# Altium PCB PCB1.PcbDoc (part 2 of 3)
Units mil, origin at the board's own origin, x right, y up, seen from the top; angles counter-clockwise.
Board outline 1649.96 x 1854.5 mil, 6 copper layers (Top Layer, Layer 2, Layer 3, Layer 4, Layer 5, Bottom Layer), stack 32.112 mil thick; 86 components, 196 nets, 681 pads, 452 vias.
Unrouted connection lines stored in the file: 66.
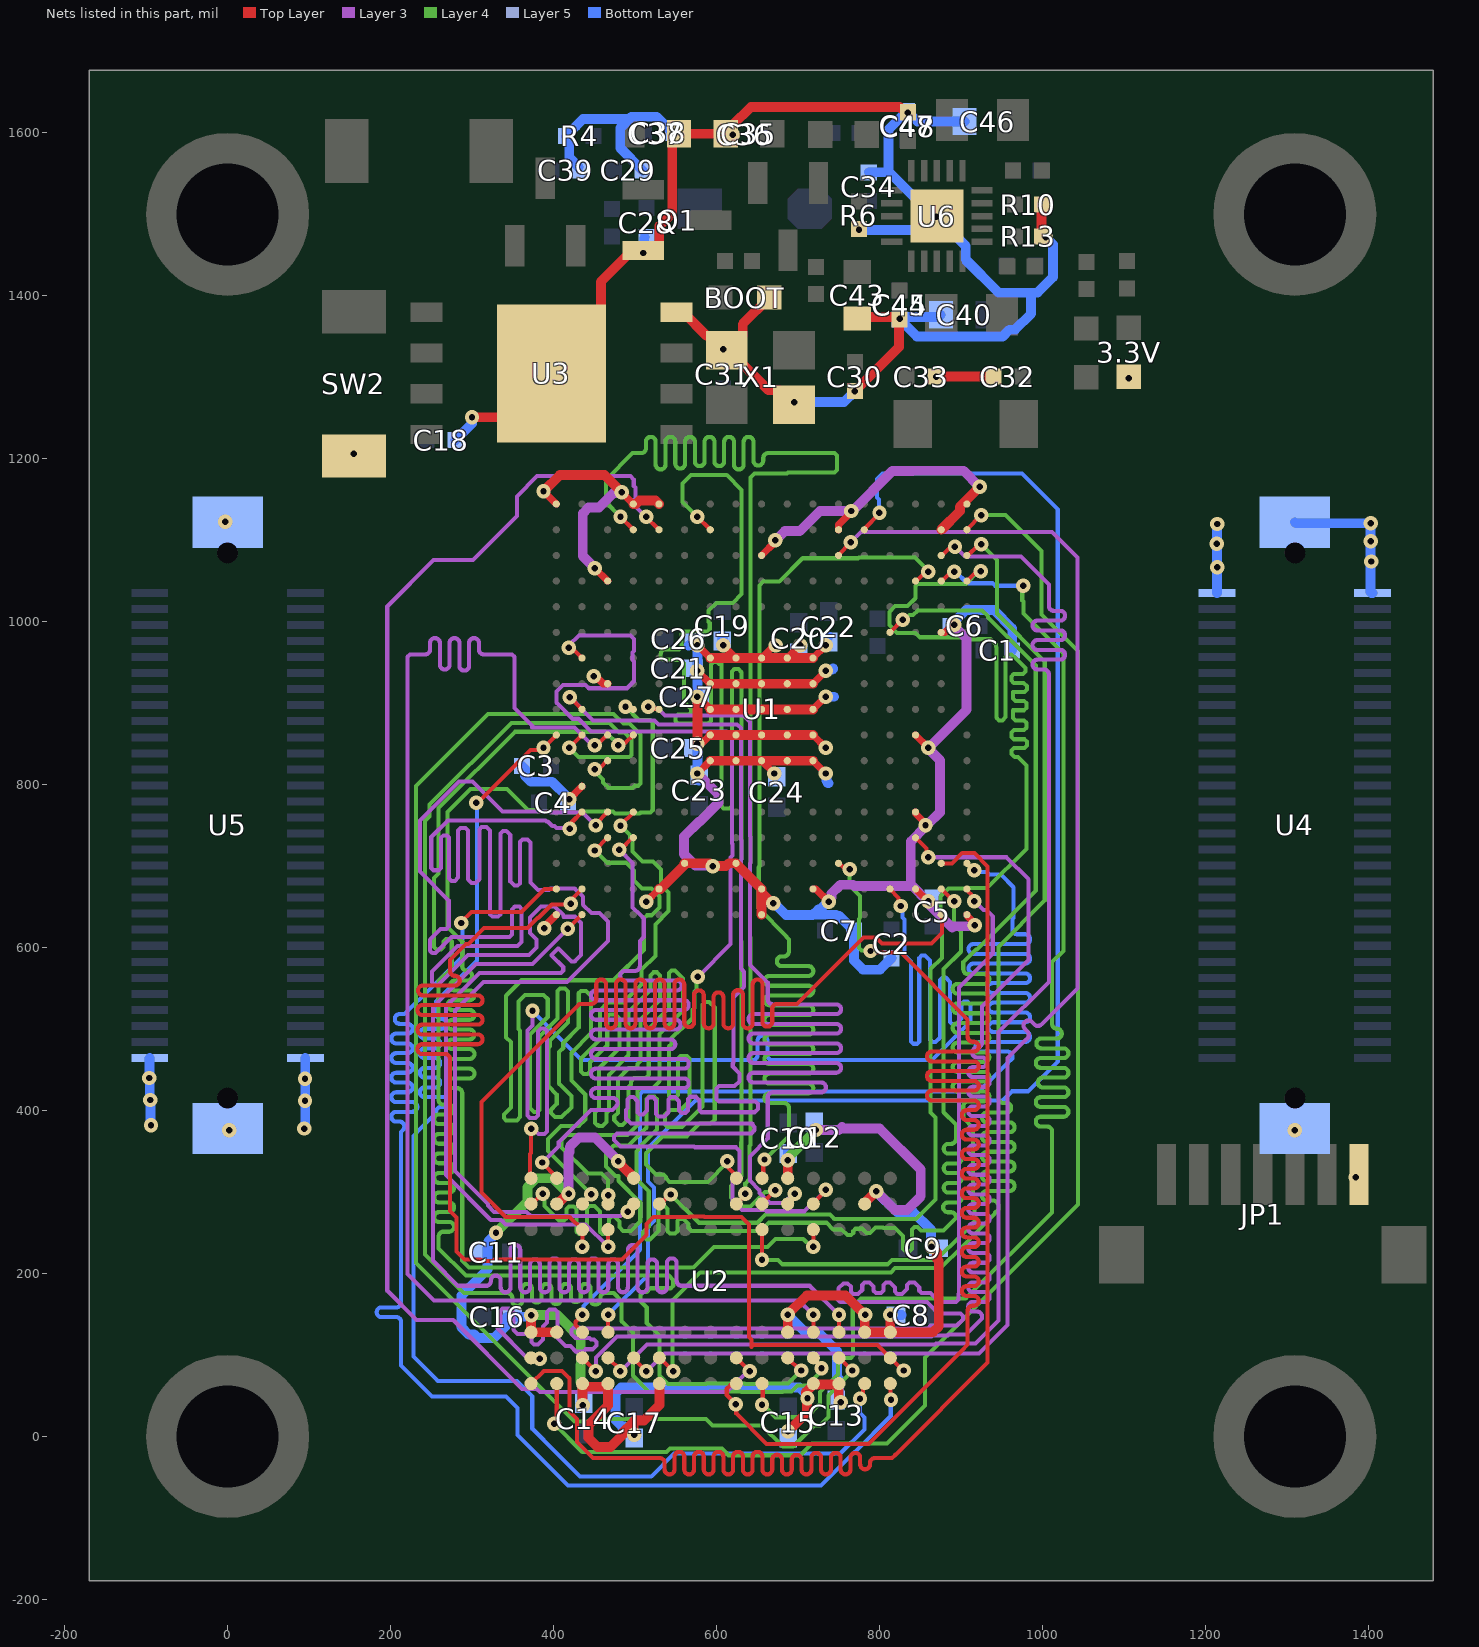
[diagram p6: the nets of this part, all layers, seen from the top]

## Via types
v1: diameter 17.7, hole 7.9, Top Layer to Bottom Layer, tented both sides, 452 vias

## Nets (pads, with @x,y where several pads share a name; then routed paths per layer and width w, separated by ;. In a path a pad name is that pad's centre, name@x,y a point inside that pad or via, vN(x,y) a via of type N, cw(c..) or ccw(c..) an arc to the next point about the centre after c; other vN are vias at no path point) (continued)
"FMC_D5 / PE8": U1.T9 U2.M8 | length 1828.9
  Top Layer w5: v1(420.01,907.5) U1.T9@435.01,892.5 ; U2.M8@718.98,285.49 718.98,287.98 720.62,287.98 734.4,301.77 v1(734.4,302.62)
  Layer 3 w5: v1(420.01,907.5) 448.5,879 524,879 529,874 625.54,874 629.98,869.55 629.98,732.62 630.98,731.62 630.98,708.84 629.98,707.84 629.98,574.46 634,570.44 634,552 620.93,538.93 620.93,458.93 620.07,458.07 620.07,453.93 628.39,445.61 628.39,435.93 622.46,430 602.93,430 600,427.07 600,413.93 602.93,411 648.07,411 651,408.07 651,402 647,398 581.93,398 579,400.93 579,413 576.98,415.02 575,417 567.93,417 565,414.07 565,399.93 562.07,397 556.93,397 554,399.93 554,411.5 549,416.5 543.93,416.5 541,413.57 541,398 536,393 529,393 526,396 526,412.5 522.07,416.43 517.93,416.43 515,413.5 515,399.93 510.07,395 505.93,395 503,397.93 503,411.5 498,416.5 493.93,416.5 491,413.57 491,403 489,401 489,390 494.93,384.07 644,384.07 644,383 646.93,380.07 646.93,375.93 643,372 478,372 474.28,368.28 474.28,364.14 482.21,356.21 572.44,356.21 573.64,355 624,355 628.46,350.54 628.46,324 620,315.54 620,289.26 631.26,278 659.94,278 661.44,276.5 708.28,276.5 v1(734.4,302.62)
"FMC_D6 / PE9": U1.P9 U2.M7 | length 1787.9
  Top Layer w5: v1(488.41,895.81) 491.39,895.81 493.97,893.23 497.26,893.23 U1.P9@498,892.5 ; v1(719,232.98) U2.M7@718.98,253.99
  Layer 4 w5: v1(488.41,895.81) 505.09,879.13 518.9,879.13 521.83,876.2 521.83,768.69 518.9,765.76 506.91,765.76 505.91,764.76 475.59,764.76 473.08,767.26 435.91,767.26 434.41,765.76 399.17,765.76 397.66,767.26 380.93,767.26 379.19,769 369,769 343,795 298.36,795 270,766.64 270,625.38 288,607.38 288,589 288,577.5 ccw(c294,577.5) 294,571.5 cw(c294,565.5) 294,559.5 279.08,559.5 ccw(c279.08,553.5) 279.08,547.5 297,547.5 cw(c297,541.5) 297,535.5 276,535.5 ccw(c276,529.5) 276,523.5 297,523.5 cw(c297,517.5) 297,511.5 276,511.5 ccw(c276,505.5) 276,499.5 297,499.5 cw(c297,493.5) 297,487.5 276,487.5 ccw(c276,481.5) 276,475.5 297,475.5 cw(c297,469.5) 297,463.5 276,463.5 ccw(c276,457.5) 276,451.5 297,451.5 cw(c297,445.5) 297,439.5 276,439.5 ccw(c276,433.5) 276,427.5 282,427.5 cw(c282,421.5) 288,421.5 288,419 288,400.8 288,216 296.58,207.42 572.07,207.42 597,232.35 662.63,232.35 672.67,242.39 706.6,242.39 716.02,232.98 v1(719,232.98)
"FMC_D7 / PE10": U1.N9 U2.L8 | length 1818.2
  Top Layer w5: v1(516.18,895.63) 519.16,895.63 521.56,893.23 528.76,893.23 U1.N9@529.5,892.5 ; U2.L8@687.49,285.49 687.49,287.23 696.4,296.15 v1(696.4,297.89)
  Layer 3 w5: v1(516.18,895.63) 518.29,893.53 528.46,893.53 536.99,885 633,885 640.98,877.02 640.98,737.17 641.98,736.17 641.98,704.28 640.98,703.28 640.98,579.02 663,557 663,539 663,536.5 ccw(c669,536.5) 669,530.5 747,530.5 cw(c747,524.5) 747,518.5 645.46,518.5 ccw(c645.46,512.5) 645.46,506.5 747,506.5 cw(c747,500.5) 747,494.5 645.46,494.5 ccw(c645.46,488.5) 645.46,482.5 747,482.5 cw(c747,476.5) 747,470.5 645.46,470.5 ccw(c645.46,464.5) 645.46,458.5 747,458.5 cw(c747,452.5) 747,446.5 645.46,446.5 ccw(c645.46,440.5) 645.46,434.5 728.42,434.5 cw(c728.42,428.5) 728.42,422.5 669,422.5 ccw(c669,416.5) 663,416.5 663,400.8 663,365.92 640.98,343.9 640.98,314.29 653.04,302.23 653.04,299.04 665.58,286.5 682.34,286.5 693.73,297.89 v1(696.4,297.89)
"FMC_D8 / PE11": U1.P10 U2.L2 | length 1810
  Top Layer w5: v1(479.48,848.66) 481.91,851.09 488.09,851.09 U1.P10@498,861 ; U2.L2@687.49,96.51 703,81 v1(704,81)
  Layer 4 w5: v1(479.48,848.66) 479.48,849.67 464.15,865 352.81,865 259,771.19 259,690.85 253.5,685.34 253.5,600.93 256.42,598 262.07,598 265,600.93 265,607.66 267.93,610.58 272.07,610.58 275.18,607.47 275.18,575.18 259,559 259,449.37 259,413.36 ccw(c265,413.36) 265,407.36 271,407.36 cw(c271,401.36) 271,395.36 259.5,395.36 ccw(c259.5,389.36) 259.5,383.36 272,383.36 cw(c272,377.36) 272,371.36 259.5,371.36 ccw(c259.5,365.36) 259.5,359.36 272,359.36 cw(c272,353.36) 272,347.36 259.5,347.36 ccw(c259.5,341.36) 259.5,335.36 272,335.36 cw(c272,329.36) 272,323.36 259.5,323.36 ccw(c259.5,317.36) 259.5,311.36 272,311.36 cw(c272,305.36) 272,299.36 259.5,299.36 ccw(c259.5,293.36) 259.5,287.36 272,287.36 cw(c272,281.36) 272,275.36 259.5,275.36 ccw(c259.5,269.36) 259.5,263.36 272,263.36 cw(c272,257.36) 272,251.36 265,251.36 ccw(c265,245.36) 259,245.36 259,230.86 292.44,197.42 541.58,197.42 547,192 547,185 544,182 519,182 514.5,177.5 510.5,177.5 507,174 507,166 514.5,158.5 514.5,139.5 530,124 530,75.08 540.43,64.65 587.32,64.65 587.67,65 634.56,65 635.06,64.5 659.79,64.5 660.29,65 688,65 v1(704,81)
"FMC_D9 / PE12": U1.R10 U2.M3 | length 1799.9
  Top Layer w5: v1(450.76,848.66) 453.12,848.66 465.46,861 U1.R10@466.5,861 ; U2.M3@718.98,128.01 718.98,142.11 v1(718.99,149.5)
  Layer 3 w5: v1(450.76,848.66) 447.35,848.66 426.01,870 374,870 374,872 352,894 352,957.07 349.07,960 331.02,960 314.5,960 cw(c314.5,966) 308.5,966 308.5,974 ccw(c302.5,974) 296.5,974 296.5,946 cw(c290.5,946) 284.5,946 284.5,974 ccw(c278.5,974) 272.5,974 272.5,947.5 cw(c266.5,947.5) 260.5,947.5 260.5,974 ccw(c254.5,974) 248.5,974 248.5,966 cw(c242.5,966) 242.5,960 240,960 223.93,960 221,957.07 221,199.56 253.56,167 284.77,167 701.07,167 718.57,149.5 v1(718.99,149.5)
"FMC_D10 / PE13": U1.T10 U2.M2 | length 1782.8
  Top Layer w5: v1(419.26,845.25) U1.T10@435.01,861 ; U2.M2@718.98,96.51 718.98,95.04 729,85.03 v1(729,83.55)
  Layer 4 w5: v1(419.26,845.25) 419.5,845.25 430.94,833.81 493.05,833.81 495.98,836.74 495.98,855.11 486.92,864.17 480.54,864.17 468.71,876 348.25,876 248,775.75 248,761.08 242.5,755.58 242.5,223.5 284.77,181.23 290,176 303,176 343.5,176 cw(c343.5,170) 349.5,170 349.5,166.3 ccw(c355.5,166.3) 361.5,166.3 361.5,181.42 cw(c367.5,181.42) 373.5,181.42 373.5,170.58 ccw(c379.5,170.58) 385.5,170.58 385.5,181.42 cw(c391.5,181.42) 397.5,181.42 397.5,168.58 ccw(c403.5,168.58) 409.5,168.58 409.5,181.42 cw(c415.5,181.42) 421.5,181.42 421.5,171 ccw(c427.5,171) 433.5,171 433.5,181.42 cw(c439.5,181.42) 445.5,181.42 445.5,167.9 ccw(c451.5,167.9) 457.5,167.9 457.5,170 cw(c463.5,170) 463.5,176 466,176 474,176 483.5,166.5 483.5,141.5 497.5,127.5 497.5,74.58 517.43,54.65 591.46,54.65 591.81,55 630.42,55 630.92,54.5 681.08,54.5 681.58,55 692.14,55 699.64,62.5 714.99,62.5 719.79,67.3 719.79,71.37 729,80.58 v1(729,83.55)
"FMC_D11 / PE14": U1.U10 U2.P1 | length 1765.5
  Top Layer w5: v1(305.15,777.85) 306.85,777.85 371.82,842.82 385.33,842.82 U1.U10@403.51,861 ; v1(776.27,46.47) 776.27,49.44 779.84,53.01 779.84,62.88 U2.P1@781.98,65.02
  Bottom Layer w5: v1(305.15,777.85) 306,777 306,584 256,534 256,528 256,518.5 ccw(c262,518.5) 262,512.5 262.8,512.5 cw(c262.8,506.5) 262.8,500.5 242,500.5 ccw(c242,494.5) 242,488.5 255,488.5 cw(c255,482.5) 255,476.5 242,476.5 ccw(c242,470.5) 242,464.5 255,464.5 cw(c255,458.5) 255,452.5 242,452.5 ccw(c242,446.5) 242,440.5 255,440.5 cw(c255,434.5) 255,428.5 242,428.5 ccw(c242,422.5) 242,416.5 266.77,416.5 cw(c266.77,410.5) 266.77,404.5 262,404.5 ccw(c262,398.5) 256,398.5 256,397 237,378 228,369 228,98 258,68 355,68 374,49 374,9.52 402.32,-18.8 432.52,-49 520.06,-49 548.08,-20.98 752.02,-20.98 781.73,8.73 781.73,23.38 776.27,28.84 v1(776.27,46.47)
  other v1: 387.76,845.25
"FMC_D12 / PE15": U1.R11 U2.N2 | length 1768.9
  Top Layer w5: v1(450.53,818.96) 452.96,821.39 457.75,821.39 465.86,829.5 U1.R11@466.5,829.5 ; U2.N2@750.48,96.51 751.11,96.51 766.49,81.13 v1@766.87,81.13
  Layer 4 w5: v1(450.53,818.96) 450.53,816.89 461.06,806.36 461.06,802.83 467.88,796 497.12,796 499.88,798.76 504.05,798.76 506.98,801.69 506.98,861.69 493.5,875.17 485.72,875.17 473.89,887 319.81,887 231.5,798.69 231.5,212.77 284.77,159.49 425.77,18.5 452.58,18.5 455.58,21.5 587.32,21.5 595.32,13.5 655.53,13.5 681.48,-12.46 694.32,-12.46 720.28,13.5 727.05,13.5 737.33,23.78 737.33,50.56 767,80.23 v1@767,80.64
  other v1: 767,81
"FMC_D13 / PD8": U1.U16 U2.R1 | length 1752
  Top Layer w5: v1(286.79,630.3) 286.79,631.38 299.41,644 329.54,644 361,644 389.08,672.08 403.45,672.08 U1.U16@403.51,672.02 ; U2.R1@813.47,65.02 813.87,64.61 813.87,45.4 v1(814.27,45)
  Bottom Layer w5: v1(286.79,630.3) 288.16,628.93 288.16,589.16 248.37,549.37 219.26,520.26 cw(c215.02,524.5) 215.02,518.5 211.23,518.5 ccw(c211.23,512.5) 211.23,506.5 221,506.5 cw(c221,500.5) 221,494.5 207,494.5 ccw(c207,488.5) 207,482.5 221,482.5 cw(c221,476.5) 221,470.5 207,470.5 ccw(c207,464.5) 207,458.5 221,458.5 cw(c221,452.5) 221,446.5 207,446.5 ccw(c207,440.5) 207,434.5 221,434.5 cw(c221,428.5) 221,422.5 207,422.5 ccw(c207,416.5) 207,410.5 226.79,410.5 cw(c226.79,404.5) 226.79,398.5 207,398.5 ccw(c207,392.5) 207,386.5 211.02,386.5 cw(c211.02,380.5) 215.26,376.26 213,374 213,372 213,183 213,164.5 cw(c207,164.5) 207,158.5 189,158.5 ccw(c189,152.5) 189,146.5 207,146.5 cw(c207,140.5) 213,140.5 213,138 213,87 251,49 342,49 356,35 356,2 418,-60 728.56,-60 769.75,-18.8 770.2,-18.8 814,25 814,44.73 v1(814.27,45)
"FMC_D14 / PD9": U1.T17 U2.N3 | length 1816.6
  Top Layer w5: v1(417.3,623.11) 417.45,623.11 434.87,640.53 U1.T17@435.01,640.53 ; U2.N3@750.48,128.01 v1(750.48,149.5)
  Layer 3 w5: v1(417.3,623.11) 417.3,622.82 374.48,580 304.82,580 252,527.18 252,216 283,185 297,185 317.25,185 ccw(c317.25,191) 323.25,191 323.25,191.47 cw(c329.25,191.47) 335.25,191.47 335.25,183 ccw(c341.25,183) 347.25,183 347.25,229 cw(c353.25,229) 359.25,229 359.25,183 ccw(c365.25,183) 371.25,183 371.25,211.42 cw(c377.25,211.42) 383.25,211.42 383.25,183 ccw(c389.25,183) 395.25,183 395.25,212.75 cw(c401.25,212.75) 407.25,212.75 407.25,183 ccw(c413.25,183) 419.25,183 419.25,211.42 cw(c425.25,211.42) 431.25,211.42 431.25,183 ccw(c437.25,183) 443.25,183 443.25,212.73 cw(c449.25,212.73) 455.25,212.73 455.25,183 ccw(c461.25,183) 467.25,183 467.25,211.42 cw(c473.25,211.42) 479.25,211.42 479.25,183 ccw(c485.25,183) 491.25,183 491.25,229 cw(c497.25,229) 503.25,229 503.25,183 ccw(c509.25,183) 515.25,183 515.25,211.42 cw(c521.25,211.42) 527.25,211.42 527.25,183 ccw(c533.25,183) 539.25,183 539.25,212.75 cw(c545.25,212.75) 551.25,212.75 551.25,191 ccw(c557.25,191) 557.25,185 571.75,185 714.56,185 750.06,149.5 v1(750.48,149.5)
"FMC_D15 / PD10": U1.T16 U2.R2 | length 1849.6
  Top Layer w5: v1(421.18,653.94) 419.69,655.44 v1@418.42,655.44 ; U1.T16@435.01,672.02 v1@418.42,655.44 ; v1(830,81) 828.98,81 U2.R2@813.47,96.51 797.9,112.08 645.08,112.08 643,110 643,112.08 643,118.98 640.07,121.91 640.07,260.44 630.95,269.56 585.44,269.56 585,270 568.04,270 567.6,269.56 522.56,269.56 514.08,261.08 514.08,247.54 483.96,217.42 327.53,217.42 325.55,215.44 312.71,215.44 310.73,217.42 290.58,217.42 281,227 281,269 273,277 273,461 273,463.5 ccw(c267,463.5) 267,469.5 239,469.5 cw(c239,475.5) 239,481.5 307,481.5 ccw(c307,487.5) 307,493.5 239,493.5 cw(c239,499.5) 239,505.5 307,505.5 ccw(c307,511.5) 307,517.5 239,517.5 cw(c239,523.5) 239,529.5 307,529.5 ccw(c307,535.5) 307,541.5 239.75,541.5 cw(c239.75,547.5) 239.75,553.5 279,553.5 ccw(c279,559.5) 279,565.5 cw(c279,571.5) 273,571.5 273,585 292.5,604.5 295.43,604.5 314.93,624 329.54,624 368.07,624 380.57,636.5 381.31,636.5 397.91,653.09 416.08,653.09 v1@418.42,655.44
"FMC_D16 / PH8": U1.T13 U2.E8 | length 1840.7
  Top Layer w5: v1(420,746.15) 422.43,748.58 422.43,753.93 U1.T13@435.01,766.51 ; v1(491,276.02) 491,277 498.51,284.51 U2.E8@498.51,285.49
  Layer 3 w5: v1(420,746.15) 419.39,746.76 403.65,746.76 401.15,749.26 398.5,749.26 393,754.76 391.55,754.76 390.04,756.26 270.26,756.26 250,736 250,697.93 252.93,695 259.07,695 262,697.93 262,735 264.93,737.93 269.07,737.93 272,735 272,684.93 274.93,682 279.07,682 283,685.93 283,744.07 285.93,747 292,747 295,744 295,683.94 299.47,679.47 304.53,679.47 309,683.94 309,745.07 311.93,748 318,748 322,744 322,640.93 324.93,638 332.07,638 335,640.93 335,740.19 337.93,743.12 342.07,743.12 347,738.19 347,681 351.93,676.07 356.07,676.07 359,679 359,730 361.93,732.93 368.16,732.93 372,729.09 372,680.2 381.2,671 394.33,671 396.1,672.78 426.09,672.78 436.33,662.54 436.33,652.67 446.57,642.43 456.44,642.43 466.8,632.07 466.8,608.25 416.56,558 313.93,558 279,523.07 279,326 319.5,285.5 319.5,283.36 327.18,275.68 367.04,275.68 372.3,270.41 482.41,270.41 488.02,276.02 v1(491,276.02)
"FMC_D17 / PH9": U1.R13 U2.D7 | length 1809.8
  Top Layer w5: v1(452,750) 452,752.01 U1.R13@466.5,766.51 ; v1(467.02,232.92) U2.D7@467.02,253.99
  Layer 3 w5: v1@450.76,750.76 435.76,765.76 396.1,765.76 394.6,767.26 337.44,767.26 300.71,804 284,804 236,756 236,693.34 271.44,657.9 271.44,625.93 268.51,623 261.5,623 248.25,609.75 248.25,596.25 251.18,593.32 255.32,593.32 275,613 346.07,613 349,615.93 349,647 352.5,650.5 358.07,650.5 361,647.57 361,607 356,602 282,602 251,571 251,557 253.93,554.07 258.07,554.07 295,591 369.92,591 379.21,600.28 379.21,610 371.26,617.95 371.26,637.26 384.5,650.5 401.5,650.5 412.17,639.83 412.17,637.96 426.41,637.96 433.8,630.56 433.8,590.8 426.1,583.1 421.96,583.1 406.21,598.86 405.36,598.86 397.72,591.22 397.72,590.37 412.02,576.07 412.02,571.93 409.09,569 405.56,569 309.37,569 268,527.63 268,320.72 323.04,265.68 335.92,265.68 341.19,260.41 439.52,260.41 v1(467.02,232.92)
"FMC_D18 / PH10": U1.P13 U2.D8 | length 1779.1
  Top Layer w5: U2.D8@467.02,285.49 467.02,295.55 v1(467.36,295.89) ; v1(482.25,749.9) 482.25,750.33 498,766.08 U1.P13@498,766.51
  Layer 4 w5: v1(467.36,295.89) 467.02,296.23 467.02,314.74 458.91,322.85 442.15,322.85 410,355 410,364 416,370 490.86,370 503,382.14 503,424 507,428 522,428 530,436 530,494 559,523 559,562 549.07,571.93 544.93,571.93 542,569 542,526 517,501 517,444 513,440 499,440 495,436 495,432 492,429 492,390 484.57,382.57 480.43,382.57 474.57,388.43 474.57,392.57 479,397 479,439 492,452 500.07,452 503,454.93 503,457 507,461 507,512 531,536 531,565.72 526.93,569.79 522.79,569.79 519,566 519,548 492,521 492,468 468,444 468,400 465,397 465,386 460.07,381.07 455.93,381.07 455,382 454,382 451,385 451,398 456,403 456,452 481,477 481,513 476,518 468.93,518 466,515.07 466,480 445,459 445,447.93 442.07,445 436.93,445 434,447.93 434,464 457,487 457,523 467,533 486,533 508,555 508,573 525,590 525,628.64 541.25,644.88 541.25,667.67 531.75,677.16 531.75,696.11 522.09,705.78 509.29,705.78 497.25,717.82 497.25,731.5 493.88,734.87 493.88,738.37 482.35,749.9 v1(482.25,749.9)
"FMC_D19 / PH11": U1.P14 U2.B9 | length 1821
  Top Layer w5: v1(386.43,336.3) 386.43,335.44 404.02,317.84 U2.B9@404.02,316.98 ; v1(480.75,720.2) 482.15,720.2 496.96,735.02 U1.P14@498,735.02
  Layer 3 w5: v1(386.43,336.3) 406.52,356.39 406.52,361.36 445.96,400.8 446.15,401 472.63,401 476.89,405.26 ccw(c472.65,409.5) 472.65,415.5 452,415.5 cw(c452,421.5) 452,427.5 560,427.5 ccw(c560,433.5) 560,439.5 452,439.5 cw(c452,445.5) 452,451.5 560,451.5 ccw(c560,457.5) 560,463.5 452,463.5 cw(c452,469.5) 452,475.5 543.5,475.5 ccw(c543.5,481.5) 543.5,487.5 452,487.5 cw(c452,493.5) 452,499.5 550.17,499.5 ccw(c550.17,505.5) 550.17,511.5 452,511.5 cw(c452,517.5) 452,523.5 560,523.5 ccw(c560,529.5) 560,535.5 452,535.5 cw(c452,541.5) 452,547.5 551.5,547.5 ccw(c551.5,553.5) 551.5,559.5 487.84,559.5 cw(c487.84,565.5) 487.84,571.5 500,571.5 ccw(c500,577.5) 506,577.5 506,599 506,608.3 510.8,613.1 510.8,635.88 506,640.69 497.25,649.44 497.25,703.8 480.84,720.2 v1(480.75,720.2)
"FMC_D20 / PH12": U1.R14 U2.C8 | length 1798.3
  Top Layer w5: U2.C8@435.52,285.49 435.52,286.81 v1(446.22,297.51) ; v1(450.76,719.27) U1.R14@466.5,735.02
  Layer 4 w5: v1(446.22,297.51) 393.05,350.68 393.05,365.05 409,381 431,381 439,389 439,420 422,437 422,471 446,495 446,541 440,547 433.93,547 431,544.07 431,502 412,483 412,477 407,472 407,433 422,418 422,404 410,392 402,392 397.07,396.93 397.07,401.07 404,408 404,420 394,430 394,477 396,479 396,486 418,508 418,546 414,550 407.93,550 405,547.07 405,513 383,491 383,401 380.07,398.07 375.93,398.07 371,403 371,493.14 393,515.14 393,537 388,542 365,542 357,534 357,500 359,498 359,392 355,388 342,388 339.07,390.93 339.07,395.07 348,404 348,484 342,490 342,541 361,560 474,560 511.26,597.26 511.26,636.26 514.78,639.78 520.58,639.78 530.25,649.44 530.25,663.11 520.58,672.78 508.42,672.78 498.75,682.44 498.75,694.61 489.09,704.27 465.75,704.27 v1(450.76,719.27)
"FMC_D21 / PH13": U1.D16 U2.A9 | length 1753.4
  Top Layer w5: U2.A9@372.53,316.98 371.13,318.38 371.13,346.57 372.53,347.98 v1(372.54,377.5) ; U1.D16@812.96,672.02 823.76,661.23 823.76,653.58 v1(826.19,651.15)
  Layer 3 w5: v1(372.54,377.5) 375.51,377.5 381.61,371.41 389.07,371.41 392,374.33 392,498 389.07,500.93 384.93,500.93 381,497 381,393.93 378.07,391 370.93,391 368,393.93 368,498.14 374.24,504.38 v1(374.24,522.36)
  Bottom Layer w5: v1(374.24,522.36) 434.61,462 642,462 644.5,462 ccw(c644.5,468) 650.5,468 650.5,486 cw(c656.5,486) 662.5,486 662.5,468 ccw(c668.5,468) 668.5,462 802,462 864.44,462 911.99,509.54 911.99,530.07 908.07,533.99 903.93,533.99 901,531.06 901,513 894,506 889.86,506 886.93,508.93 886.93,558.07 881.5,563.5 877.36,563.5 874.43,560.57 874.43,489.43 869.07,484.07 864.93,484.07 862,487 862,584.38 856.07,590.31 851.93,590.31 849,587.38 849,485 846.07,482.07 841.93,482.07 839,485 839,583 831,591 831,634.6 828.62,636.99 828.62,648.72 v1(826.19,651.15)
"FMC_D22 / PH14": U1.B17 U2.C7 | length 1846.3
  Top Layer w5: v1(435.52,232.92) 435.52,239.88 U2.C7@435.52,253.99 419.95,269.56 341.44,269.56 311.5,299.5 311.5,400.8 311.5,410.83 431.67,531 444,531 446.5,531 ccw(c446.5,537) 452.5,537 452.5,555 cw(c458.5,555) 464.5,555 464.5,507 ccw(c470.5,507) 476.5,507 476.5,555 cw(c482.5,555) 488.5,555 488.5,507 ccw(c494.5,507) 500.5,507 500.5,555 cw(c506.5,555) 512.5,555 512.5,507 ccw(c518.5,507) 524.5,507 524.5,555 cw(c530.5,555) 536.5,555 536.5,507 ccw(c542.5,507) 548.5,507 548.5,555 cw(c554.5,555) 560.5,555 560.5,508.5 ccw(c566.5,508.5) 572.5,508.5 572.5,541.65 cw(c578.5,541.65) 584.5,541.65 584.5,507 ccw(c590.5,507) 596.5,507 596.5,539.15 cw(c602.5,539.15) 608.5,539.15 608.5,507 ccw(c614.5,507) 620.5,507 620.5,541.93 cw(c626.5,541.93) 632.5,541.93 632.5,507 ccw(c638.5,507) 644.5,507 644.5,555 cw(c650.5,555) 656.5,555 656.5,509.02 ccw(c662.5,509.02) 668.5,509.02 668.5,525 cw(c674.5,525) 674.5,531 699.02,531 711,542.98 780.4,612.38 795.96,612.38 803.41,604.92 863.98,604.92 877,617.95 877,631.61 876.69,631.92 876.69,639.79 U1.B17@875.95,640.53
"FMC_D23 / PH15": U1.B16 U2.A8 | length 1803.2
  Top Layer w5: U2.A8@372.53,285.49 373.56,285.49 385.93,297.86 v1(386.96,297.86) ; U1.B16@875.95,672.02 876.25,672.02 891.42,656.85 v1(891.72,656.85)
  Layer 4 w5: v1(386.96,297.86) 389.07,295.75 389.07,282.93 407,265 413.07,265 416,267.93 416,279.48 418.93,282.41 424.92,282.41 428.25,279.08 428.25,251.35 431.18,248.42 436.42,248.42 441,253 441,279.73 443.93,282.66 450.34,282.66 457,276 457,251.35 459.93,248.42 465.07,248.42 468,251.35 468,267.1 470.93,270.03 475.07,270.03 481,264.1 481,256.93 485.58,252.35 495,252.35 506.5,263.85 506.5,287.5 480.09,313.91 480.09,319.63 476.26,319.63 464.25,331.64 464.25,347.25 474,357 492,357 514,379 514,400.8 514,414.07 516.93,417 524.07,417 527,414.07 527,400.8 527,377 503.52,353.52 503.52,351.52 502,350 502,316 517,301 517,258 510,251 510,246 514.26,241.74 518.4,241.74 529,252.34 529,280.03 531.93,282.96 536.07,282.96 540,279.03 540,251.93 542.93,249 549.07,249 552,251.93 552,264.8 554.12,266.93 559.88,266.93 566,260.8 566,255.93 569.58,252.35 654.35,252.35 664.39,262.39 735.15,262.39 743.27,254.27 753.73,254.27 760.93,247.07 765.07,247.07 768,250 768,252.07 770.93,255 779,255 784.43,249.57 788.57,249.57 795.34,256.34 804.66,256.34 805,256 819,256 828.97,246.03 828.97,229.93 831.9,227 837.07,227 840,229.93 840,254 842.93,256.93 847.07,256.93 851,253 879,253 886.75,260.75 894,268 894,269.25 ccw(c888,269.25) 888,275.25 884.27,275.25 cw(c884.27,281.25) 884.27,287.25 895.23,287.25 ccw(c895.23,293.25) 895.23,299.25 885,299.25 cw(c885,305.25) 885,311.25 895.23,311.25 ccw(c895.23,317.25) 895.23,323.25 885,323.25 cw(c885,329.25) 885,335.25 895.23,335.25 ccw(c895.23,341.25) 895.23,347.25 885,347.25 cw(c885,353.25) 885,359.25 888,359.25 ccw(c888,365.25) 894,365.25 894,383 879,398 879,399.05 879,574 900,595 900,620 891.7,628.3 v1(891.72,656.85)
"FMC_D24 / PI0": U1.A16 U2.A2 | length 1799.9
  Top Layer w5: U2.A2@372.54,96.04 382.04,96.04 v1@382.51,95.56 ; U1.A16@907.45,672.02 907.45,670.98 909.38,669.05 909.38,668.59 912.98,664.98 912.98,663.8 916.5,660.29 v1(916.5,657.05)
  Layer 3 w5: v1(382.97,95.56) 382.01,96.53 367.47,96.53 331.13,132.87 331.13,137.01 334.69,140.58 334.69,154.07 337.62,157 346,157 351,152 351,131 355.93,126.07 370.07,126.07 373,123.14 373,116 376,113 381,113 387,119 387,135 392,140 392,153.07 394.93,156 402.07,156 405,153.07 405,121 414.94,111.06 420.89,111.06 427.95,104 436,104 439.07,107.07 447.93,107.07 452.79,111.93 452.79,116.07 449.86,119 446,119 444,121 427,121 422,126 422,131.07 424.93,134 431.81,134 433,132.81 859.81,132.81 863,136 895,136 902.54,143.54 902.54,147.69 899.41,150.82 871.8,150.82 868.87,153.75 868.87,154.73 858.6,165 752,165 747.07,169.93 747.07,174.07 750,177 750,182 756,188 761,188 765,184 765,177.93 767.93,175 774,175 779,180 779,186.07 781.93,189 788,189 793,184 793,178.93 795.93,176 802,176 805,179 805,186.07 807.93,189 813,189 819,183 819,177.93 821.93,175 828,175 834,181 834,186.07 836.93,189 843,189 849,183 849,178.93 851.93,176 863,176 874,165 894.07,165 897,167.93 897,175 897.53,175.53 897.53,400.8 897.53,551.18 939.22,592.87 939.22,638.29 931.2,646.31 927.66,646.31 916.92,657.05 v1(916.5,657.05)
"FMC_D25 / PI1": U1.A15 U2.C3 | length 1762.8
  Top Layer w5: U2.C3@435.52,128.01 426.84,136.68 426.84,140.82 v1(435.52,149.5) ; U1.A15@907.45,703.52 907.84,703.52 916.11,695.25 v1(916.5,695.25)
  Bottom Layer w5: v1(435.52,149.5) 436.87,150.85 436.87,160.07 506,229.19 506,269.11 506.5,269.6 506.5,308.43 506,308.93 506,400.8 506,420.04 509.42,423.47 922.47,423.47 956.95,457.95 963.18,464.18 963.18,466.45 ccw(c957.18,466.45) 957.18,472.45 924.01,472.45 cw(c924.01,478.45) 924.01,484.45 979,484.45 ccw(c979,490.45) 979,496.45 939.99,496.45 cw(c939.99,502.45) 939.99,508.45 979,508.45 ccw(c979,514.45) 979,520.45 939.99,520.45 cw(c939.99,526.45) 939.99,532.45 979,532.45 ccw(c979,538.45) 979,544.45 938.52,544.45 cw(c938.52,550.45) 938.52,556.45 979,556.45 ccw(c979,562.45) 979,568.45 915.45,568.45 cw(c915.45,574.45) 915.45,580.45 979,580.45 ccw(c979,586.45) 979,592.45 915.45,592.45 cw(c915.45,598.45) 915.45,604.45 979,604.45 ccw(c979,610.45) 979,616.45 969.18,616.45 cw(c969.18,622.45) 963.18,622.45 963.18,634.77 964.85,636.44 964.85,674.15 949.42,689.58 935.35,689.58 932.11,692.82 918.93,692.82 v1(916.5,695.25)
"FMC_D26 / PI2": U1.B15 U2.A1 | length 1823.4
  Top Layer w5: U2.A1@372.53,65.02 388.1,80.59 410.47,80.59 419.59,71.47 419.59,30.95 429,21.55 429,-6.96 448.54,-26.5 516,-26.5 530.5,-26.5 cw(c530.5,-32.5) 536.5,-32.5 536.5,-40.5 ccw(c542.5,-40.5) 548.5,-40.5 548.5,-24.8 cw(c554.5,-24.8) 560.5,-24.8 560.5,-40.5 ccw(c566.5,-40.5) 572.5,-40.5 572.5,-24.8 cw(c578.5,-24.8) 584.5,-24.8 584.5,-40.5 ccw(c590.5,-40.5) 596.5,-40.5 596.5,-24.8 cw(c602.5,-24.8) 608.5,-24.8 608.5,-40.5 ccw(c614.5,-40.5) 620.5,-40.5 620.5,-24.8 cw(c626.5,-24.8) 632.5,-24.8 632.5,-40.5 ccw(c638.5,-40.5) 644.5,-40.5 644.5,-24.8 cw(c650.5,-24.8) 656.5,-24.8 656.5,-40.5 ccw(c662.5,-40.5) 668.5,-40.5 668.5,-28.41 cw(c674.5,-28.41) 680.5,-28.41 680.5,-40.5 ccw(c686.5,-40.5) 692.5,-40.5 692.5,-28.46 cw(c698.5,-28.46) 704.5,-28.46 704.5,-40.5 ccw(c710.5,-40.5) 716.5,-40.5 716.5,-26.01 cw(c722.5,-26.01) 728.5,-26.01 728.5,-40.5 ccw(c734.5,-40.5) 740.5,-40.5 740.5,-26.01 cw(c746.5,-26.01) 752.5,-26.01 752.5,-40.5 ccw(c758.5,-40.5) 764.5,-40.5 764.5,-26.01 cw(c770.5,-26.01) 776.5,-26.01 776.5,-34.25 ccw(c782.5,-34.25) 788.5,-34.25 788.5,-32.5 cw(c794.5,-32.5) 794.5,-26.5 815.5,-26.5 819.56,-22.44 933,91 933,566.55 933,699.75 916.66,716.09 901.73,716.09 889.16,703.52 U1.B15@877,703.52
"FMC_D27 / PI3": U1.C14 U2.C2 | length 1821.5
  Top Layer w5: U2.C2@435.52,96.51 435.59,96.51 452.04,80.07 v1(452.11,80.07) ; U1.C14@844.46,735.02 857.78,721.7 857.78,713.38 v1(860.21,710.95)
  Layer 3 w5: v1(452.11,80.07) 452,80.18 452,97 477.79,122.79 863.94,122.79 865.15,124 884.14,124 885.14,125 906.23,125 926,144.77 926,147.27 ccw(c920,147.27) 920,153.27 915,153.27 cw(c915,159.27) 915,165.27 929.42,165.27 ccw(c929.42,171.27) 929.42,177.27 915,177.27 cw(c915,183.27) 915,189.27 929.42,189.27 ccw(c929.42,195.27) 929.42,201.27 915,201.27 cw(c915,207.27) 915,213.27 929.42,213.27 ccw(c929.42,219.27) 929.42,225.27 915,225.27 cw(c915,231.27) 915,237.27 929.42,237.27 ccw(c929.42,243.27) 929.42,249.27 915,249.27 cw(c915,255.27) 915,261.27 929.42,261.27 ccw(c929.42,267.27) 929.42,273.27 915,273.27 cw(c915,279.27) 915,285.27 929.42,285.27 ccw(c929.42,291.27) 929.42,297.27 915,297.27 cw(c915,303.27) 915,309.27 929.42,309.27 ccw(c929.42,315.27) 929.42,321.27 915,321.27 cw(c915,327.27) 915,333.27 929.42,333.27 ccw(c929.42,339.27) 929.42,345.27 915,345.27 cw(c915,351.27) 915,357.27 929.42,357.27 ccw(c929.42,363.27) 929.42,369.27 915,369.27 cw(c915,375.27) 915,381.27 929.42,381.27 ccw(c929.42,387.27) 929.42,393.27 915,393.27 cw(c915,399.27) 915,405.27 929.42,405.27 ccw(c929.42,411.27) 929.42,417.27 915,417.27 cw(c915,423.27) 915,429.27 929.42,429.27 ccw(c929.42,435.27) 929.42,441.27 915,441.27 cw(c915,447.27) 915,453.27 926.07,453.27 ccw(c926.07,459.27) 926.07,465.27 920,465.27 cw(c920,471.27) 920,477.27 ccw(c920,483.27) 926,483.27 926,504.43 926,528 983,585 983,684 956.05,710.95 v1(860.21,710.95)
"FMC_D28 / PI6": U1.A2 U2.B1 | length 1812.2
  Top Layer w5: v1@404,15.73 U2.B1@404.02,65.02 ; U1.A2@907.45,1112.97 907.45,1113.45 v1(925,1131)
  Layer 4 w5: v1(400.81,15.73) 435.34,-18.8 438.8,-18.8 439,-19 538.8,-19 542.9,-14.9 606.9,-14.9 615,-23 703,-23 717.56,-8.44 809.56,-8.44 856,38 856,97 1044,285 1044,964 999,1009 999,1087 955,1131 v1(925,1131)
"FMC_D29 / PI7": U1.B3 U2.D2 | length 1801.4
  Top Layer w5: U2.D2@467.02,96.51 482,81.53 v1(482,80) ; U1.B3@875.95,1081.47 876.91,1081.47 884.87,1089.43 890.38,1089.43 v1(892.81,1091.86)
  Layer 3 w5: v1(482,80) 514.79,112.79 868.08,112.79 869.29,114 901.23,114 918,114 946.42,142.42 946.42,496.42 1008,558 1008,933 1008,935.5 ccw(c1002,935.5) 1002,941.5 994,941.5 cw(c994,947.5) 994,953.5 1022,953.5 ccw(c1022,959.5) 1022,965.5 994,965.5 cw(c994,971.5) 994,977.5 1022,977.5 ccw(c1022,983.5) 1022,989.5 994,989.5 cw(c994,995.5) 994,1001.5 1022,1001.5 ccw(c1022,1007.5) 1022,1013.5 1014,1013.5 cw(c1014,1019.5) 1008,1019.5 1008,1032 1008,1046 973.92,1080.08 908.84,1080.08 908.27,1080.65 904.73,1080.65 893.53,1091.86 v1(892.81,1091.86)
"FMC_D30 / PI9": U1.E2 U2.D3 | length 1791.2
  Top Layer w5: U2.D3@467.02,128.01 467.02,142.11 v1(467.02,149.5) ; U1.E2@781.46,1112.97 781.46,1113.96 800.14,1132.64 v1(800.14,1133.64)
  Bottom Layer w5: v1(467.02,149.5) 516,198.48 516,257.08 523.53,264.61 523.53,305.54 516,313.07 516,354 562.8,400.8 574.47,412.47 951.47,412.47 962.74,423.74 982.33,423.74 1019,460.41 1019,1138 975,1182 804,1182 797.21,1175.21 797.21,1152.49 799.71,1149.99 799.71,1134.07 v1(800.14,1133.64)
"FMC_D31 / PI10": U1.F3 U2.E2 | length 1808.7
  Top Layer w5: U2.E2@498.51,96.51 498.51,95.49 v1(514,80) ; U1.F3@749.97,1081.47 749.97,1082.22 764.81,1097.06 v1(764.81,1097.81)
  Layer 3 w5: v1(514,80) 536,102 901.23,102 922.51,102 957.42,136.9 957.42,464.42 980,487 981.77,488.77 ccw(c977.53,493.01) 981.77,497.25 978.67,500.35 cw(c982.91,504.59) 978.67,508.84 cw(c982.91,504.59) 987.16,508.84 990.25,505.74 ccw(c994.5,509.98) 998.74,505.74 1032,539 1043,550 1043,1079 1011.71,1110.29 981.43,1110.29 777.29,1110.29 v1(764.81,1097.81)
"FMC_NBL0 / PE0": U1.C4 U2.K9 | length 1794.7
  Top Layer w5: U2.K9@655.99,316.98 657.5,318.49 657.5,338.5 v1(659,340) ; U1.C4@844.46,1049.98 845.5,1049.98 856.99,1061.47 v1(860.2,1061.47)
  Layer 4 w5: v1(659,340) 659.92,340 689,369.08 689,400.8 689,403.3 ccw(c683,403.3) 683,409.3 665,409.3 cw(c665,415.3) 665,421.3 713,421.3 ccw(c713,427.3) 713,433.3 665,433.3 cw(c665,439.3) 665,445.3 713,445.3 ccw(c713,451.3) 713,457.3 665,457.3 cw(c665,463.3) 665,469.3 713,469.3 ccw(c713,475.3) 713,481.3 665,481.3 cw(c665,487.3) 665,493.3 713,493.3 ccw(c713,499.3) 713,505.3 665,505.3 cw(c665,511.3) 665,517.3 713,517.3 ccw(c713,523.3) 713,529.3 665,529.3 cw(c665,535.3) 665,541.3 713,541.3 ccw(c713,547.3) 713,553.3 665,553.3 cw(c665,559.3) 665,565.3 713,565.3 ccw(c713,571.3) 713,577.3 680.14,577.3 cw(c680.14,583.3) 680.14,589.3 683,589.3 ccw(c683,595.3) 689,595.3 689,610.13 685.97,613.17 685.97,613.97 652,647.94 652,698.74 652.98,699.72 652.98,1044.78 657.42,1049.22 677.16,1049.22 705.94,1078 774.05,1078 775.05,1079 843.5,1079 860.2,1062.3 v1(860.2,1061.47)
"FMC_NBL1 / PE1": U1.B4 U2.K1 | length 1774.4
  Top Layer w5: v1(655.99,39) 656.88,39.89 656.88,64.13 U2.K1@655.99,65.02 ; U1.B4@876.07,1050.09 877.11,1050.09 888.49,1061.47 v1(891.7,1061.47)
  Layer 4 w5: v1(655.99,39) 656.99,39 672.38,23.61 710.36,23.61 727.33,40.58 727.33,54.7 748.99,76.36 748.99,90.22 755.39,96.61 764.96,96.61 767.89,99.54 767.89,130.31 767.36,130.83 767.36,159.18 777.34,169.17 901.23,169.17 906.01,169.17 1012,275.16 1012,372 1012,374.5 ccw(c1006,374.5) 1006,380.5 998,380.5 cw(c998,386.5) 998,392.5 1026,392.5 ccw(c1026,398.5) 1026,404.5 998,404.5 cw(c998,410.5) 998,416.5 1026,416.5 ccw(c1026,422.5) 1026,428.5 1000.64,428.5 cw(c1000.64,434.5) 1000.64,440.5 1026,440.5 ccw(c1026,446.5) 1026,452.5 998,452.5 cw(c998,458.5) 998,464.5 1026,464.5 ccw(c1026,470.5) 1026,476.5 998.72,476.5 cw(c998.72,482.5) 998.72,488.5 1018,488.5 ccw(c1018,494.5) 1018,500.5 cw(c1018,506.5) 1012,506.5 1012,544 1012,582.28 1025.89,596.17 1025.89,961.34 976.89,1010.34 976.89,1024.78 975.41,1026.26 975.41,1043.26 v1(976.4,1044.26)
  Bottom Layer w5: v1(891.7,1061.47) 893.73,1061.47 907.9,1047.3 938.91,1047.3 941.95,1044.26 v1(976.4,1044.26)
"FMC_NBL2 / PI4": U1.A4 U2.F8 | length 1778.6
  Top Layer w5: U2.F8@530.01,285.49 531.17,285.49 542.73,297.06 v1(543.89,297.06) ; U1.A4@907.45,1049.98 917.19,1059.72 921.81,1059.72 v1(924.24,1062.15)
  Layer 4 w5: v1(543.89,297.06) 578.59,262.35 650.2,262.35 660.24,272.39 739.29,272.39 744.69,267 845,267 869,291 869,391.52 863,397.52 863,573.56 877,587.56 877,646.48 875.22,648.26 875.22,663.13 884.87,672.78 909.36,672.78 909.67,673.08 932.31,673.08 980.44,721.21 980.44,823.56 970.04,833.96 966.16,833.96 962.2,837.93 962.2,842.07 965.12,845 978.07,845 981,847.93 981,852.88 978.07,855.8 965.12,855.8 962.2,858.73 962.2,864.07 965.12,867 977.51,867 980.44,869.93 980.44,876.07 977.51,879 966.93,879 964,881.93 964,891.44 977.51,891.44 980.44,894.37 980.44,900.07 977.51,903 966.93,903 964,905.93 964,914 978.07,914 981,916.93 981,921.07 977.07,925 964.93,925 962,927.93 962,933.07 964.93,936 976.54,936 979.47,938.93 979.47,943.47 965.94,957 965,957 962.07,959.93 957.93,959.93 955,957 955,883 951.07,879.07 946.93,879.07 943.75,882.25 943.75,968.64 943,969.39 943,972 936.44,978.56 910.52,978.56 908.07,981 849.69,981 844.46,986.23 821.87,986.23 812.21,995.9 812.21,1012.21 819.23,1019.23 834.51,1019.23 844.18,1028.9 844.18,1043.69 847.11,1046.62 906.32,1046.62 921.85,1062.15 v1(924.24,1062.15)
"FMC_NBL3 / PI5": U1.A3 U2.F2 | length 1788.7
  Top Layer w5: U2.F2@530.01,96.51 530.49,96.51 530.49,96.27 546.61,80.15 v1(546.85,80.15) ; U1.A3@907.45,1081.47 908.49,1081.47 922.04,1095.02 v1(925.25,1095.02)
  Layer 4 w5: v1(546.85,80.15) 546,81 546,167.22 580.14,201.35 814.14,201.35 819.46,206.68 875.23,206.68 901.23,232.67 942.14,273.59 942.14,275 946,278.86 946,283.5 ccw(c940,283.5) 940,289.5 932,289.5 cw(c932,295.5) 932,301.5 960,301.5 ccw(c960,307.5) 960,313.5 932,313.5 cw(c932,319.5) 932,325.5 960,325.5 ccw(c960,331.5) 960,337.5 932,337.5 cw(c932,343.5) 932,349.5 960,349.5 ccw(c960,355.5) 960,361.5 932,361.5 cw(c932,367.5) 932,373.5 960,373.5 ccw(c960,379.5) 960,385.5 932,385.5 cw(c932,391.5) 932,397.5 955.86,397.5 ccw(c955.86,403.5) 955.86,409.5 952,409.5 cw(c952,415.5) 946,415.5 946,428 946,601 1003,658 1003,951.05 944.2,1009.85 944.2,1076.06 v1(925.25,1095.02)
"FMC_SDCKE0 / PH2": U1.N2 U2.J2 | length 1831.1
  Top Layer w5: v1(513.75,1128.72) U1.N2@529.5,1112.97 ; U2.J2@624.5,96.51 v1(641,80)
  Layer 3 w5: v1(513.75,1128.72) 498.5,1143.96 498.5,1149.17 500.5,1151.17 500.5,1164.83 498.5,1166.83 498.5,1174.57 494.32,1178.75 379.75,1178.75 355,1154 355,1130 301,1076 253,1076 196,1019 196,178.93 231.93,143 277,143 361.5,58.5 379.42,58.5 383.42,54.5 612.58,54.5 638.08,80 v1(641,80)
"FMC_SDCLK / PG8": U1.F15 U2.J1 | length 1768
  Top Layer w5: U2.J1@624.5,65.02 622.36,62.88 616.64,62.88 612.7,58.94 612.7,50.8 624.39,39.11 624.39,27.97 661.46,-9.09 786.43,-9.09 901.23,105.7 908.45,112.92 908.45,125.72 908.45,154.5 cw(c914.45,154.5) 914.45,160.5 916,160.5 ccw(c916,166.5) 916,172.5 907.23,172.5 cw(c907.23,178.5) 907.23,184.5 916,184.5 ccw(c916,190.5) 916,196.5 907.23,196.5 cw(c907.23,202.5) 907.23,208.5 916,208.5 ccw(c916,214.5) 916,220.5 907.23,220.5 cw(c907.23,226.5) 907.23,232.5 916,232.5 ccw(c916,238.5) 916,244.5 907.23,244.5 cw(c907.23,250.5) 907.23,256.5 916,256.5 ccw(c916,262.5) 916,268.5 907.23,268.5 cw(c907.23,274.5) 907.23,280.5 916,280.5 ccw(c916,286.5) 916,292.5 907.23,292.5 cw(c907.23,298.5) 907.23,304.5 916,304.5 ccw(c916,310.5) 916,316.5 907.23,316.5 cw(c907.23,322.5) 907.23,328.5 916,328.5 ccw(c916,334.5) 916,340.5 907.23,340.5 cw(c907.23,346.5) 907.23,352.5 916,352.5 ccw(c916,358.5) 916,364.5 907.23,364.5 cw(c907.23,370.5) 907.23,376.5 916,376.5 ccw(c916,382.5) 916,388.5 907.23,388.5 cw(c907.23,394.5) 907.23,400.5 916,400.5 ccw(c916,406.5) 916,412.5 864.45,412.5 cw(c864.45,418.5) 864.45,424.5 916,424.5 ccw(c916,430.5) 916,436.5 864.45,436.5 cw(c864.45,442.5) 864.45,448.5 916,448.5 ccw(c916,454.5) 916,460.5 864.45,460.5 cw(c864.45,466.5) 864.45,472.5 916,472.5 ccw(c916,478.5) 916,484.5 914.45,484.5 cw(c914.45,490.5) 908.45,490.5 908.45,493 908.45,511.92 826.45,593.92 791.08,593.92 v1(789.12,595.88) ; U1.F15@749.97,703.52 750.77,703.52 755.87,698.41 761.49,698.41 v1(763.59,696.31)
  Layer 4 w5: v1(763.59,696.31) 763.2,695.91 763.2,676.41 776.2,663.41 776.2,636.71 774.92,635.43 774.92,599.45 777.85,596.52 788.48,596.52 v1(789.12,595.88)
  other v1: 624,39.5
"FMC_SDNCAS / PG15": U1.D6 U2.K7 | length 1799.2
  Top Layer w5: v1(655.99,216.85) U2.K7@655.99,253.99 ; U1.D6@812.96,986.98 v1(828.71,1002.73)
  Layer 4 w5: v1(655.99,216.85) 675.61,216.85 681.07,211.39 810.04,211.39 815.34,216.7 869.7,216.7 901.23,248.23 917,264 917,286.46 915,288.46 915,374.54 915.16,374.7 915.16,378.84 903,391 903,405.5 cw(c909,405.5) 909,411.5 929,411.5 ccw(c929,417.5) 929,423.5 896,423.5 cw(c896,429.5) 896,435.5 929,435.5 ccw(c929,441.5) 929,447.5 896,447.5 cw(c896,453.5) 896,459.5 929,459.5 ccw(c929,465.5) 929,471.5 896,471.5 cw(c896,477.5) 896,483.5 929,483.5 ccw(c929,489.5) 929,495.5 896,495.5 cw(c896,501.5) 896,507.5 929,507.5 ccw(c929,513.5) 929,519.5 896,519.5 cw(c896,525.5) 896,531.5 929,531.5 ccw(c929,537.5) 929,543.5 896,543.5 cw(c896,549.5) 896,555.5 929,555.5 ccw(c929,561.5) 929,567.5 909,567.5 cw(c909,573.5) 903,573.5 903,582.44 918.53,597.97 919.72,597.97 992,670.25 992,946.49 933.2,1005.29 933.2,1006.81 926.04,1013.97 898.57,1013.97 ; v1(828.71,1002.73) 831.69,1002.73 837.19,1008.23 841.39,1008.23 847.15,1014 898.54,1014
"FMC_SDNE0 / PH3": U1.P2 U2.J8 | length 1786.5
  Top Layer w5: v1(482.25,1128.72) U1.P2@498,1112.97 ; U2.J8@624.5,285.49 624.5,286.17 635.5,297.17 v1(635.5,297.85)
  Layer 4 w5: v1(482.25,1128.72) 464.25,1146.72 464.25,1174.25 497,1207 505,1207 507.5,1207 ccw(c507.5,1213) 513.5,1213 513.5,1221 cw(c519.5,1221) 525.5,1221 525.5,1193 ccw(c531.5,1193) 537.5,1193 537.5,1221 cw(c543.5,1221) 549.5,1221 549.5,1194.11 ccw(c555.5,1194.11) 561.5,1194.11 561.5,1221 cw(c567.5,1221) 573.5,1221 573.5,1197 ccw(c579.5,1197) 585.5,1197 585.5,1221 cw(c591.5,1221) 597.5,1221 597.5,1197 ccw(c603.5,1197) 609.5,1197 609.5,1221 cw(c615.5,1221) 621.5,1221 621.5,1193 ccw(c627.5,1193) 633.5,1193 633.5,1221 cw(c639.5,1221) 645.5,1221 645.5,1197.8 ccw(c651.5,1197.8) 657.5,1197.8 657.5,1201 cw(c663.5,1201) 663.5,1207 695,1207 745.07,1207 748,1204.07 748,1186.07 745.07,1183.14 688,1183.14 686.67,1181.8 646.7,1181.8 641.98,1177.09 641.98,704.28 641,703.3 641,613.39 642,612.39 642,358 640.5,356.5 640.5,315.85 635.43,310.79 635.43,297.92 v1(635.5,297.85)
"FMC_SDNRAS / PF11": U1.T7 U2.J9 | length 1763.7
  Top Layer w5: v1(419,968) 422.5,968 U1.T7@435.01,955.49 ; v1(613.16,338.05) 615.07,336.14 615.07,329.43 624.5,320 U2.J9@624.5,316.98
  Layer 3 w5: v1@419.26,971.24 431.32,983.3 494.7,983.3 499,979 499,964.4 497,962.4 497,953 499,951 499,932.91 499.01,927.01 490.42,918.42 443.35,918.42 439.42,922.35 411.52,922.35 403.5,914.33 403.5,900.67 423.17,881 430.56,881 446.26,865.31 612.23,865.31 618.98,858.55 618.98,728.06 619.98,727.06 619.98,713.39 617.46,710.87 617.46,604.46 v1(577.15,564.15)
  Layer 4 w5: v1(577.15,564.15) 575.5,562.5 575.5,548.65 573,546.15 573,526 571,524 571,514 558,501 557,501 545,489 545,482 542,479 542,418 544.93,415.07 549.07,415.07 553,419 553,464.07 555.93,467 564.07,467 567,464.07 567,412 556,401 543,401 537,395 537,382.93 539.93,380 558,380 583,405 583,530.29 585.93,533.22 591.22,533.22 598,526.44 598,389.14 592.93,384.07 579.24,384.07 563.74,368.57 534.44,368.57 513.52,347.65 513.52,333.77 525.95,321.34 535,321.34 538,318.34 538,317 542.44,312.56 589.5,312.56 613.16,336.22 v1(613.16,338.05)
"FMC_SDNWE / PC0": U1.L2 U2.K8 | length 1804.3
  Top Layer w5: v1(576.74,1128.72) U1.L2@592.49,1112.97 ; U2.K8@655.99,285.49 655.99,285.99 v1(672,302)
  Layer 4 w5: v1(576.74,1128.72) 558.55,1146.91 558.55,1169.62 568.93,1180 612.72,1180 630.98,1161.74 630.98,1033.98 620.31,1023.31 600.16,1023.31 590.5,1013.65 590.5,999.98 591.79,998.69 591.79,990.93 588.86,988 559.93,988 557,985.07 557,968.93 554.07,966 534.93,966 532,963.07 532,961 531.57,960.57 531.57,956.43 534.5,953.5 548.83,953.5 549.33,953 556,953 560.24,948.76 560.24,901.41 568.58,893.07 568.58,888.93 565.65,886 552.93,886 550,883.07 550,877.93 552.93,875 590,875 593.24,878.24 593.24,947.32 596.61,950.69 600.31,950.69 602.93,948.07 606,948.07 606,773.93 608.93,771 616.07,771 619,773.93 619,939.07 621.93,942 627,942 630.98,938.02 630.98,708.84 630,707.85 630,608.83 631,607.83 631,361.14 630.5,360.64 630.5,320 617.83,307.32 617.83,293.61 629.08,282.35 641.92,282.35 659.46,299.9 669.9,299.9 v1(672,302)
GND: 3.3V.2 BOOT.2 C1.1 C2.1 C3.1 C4.2 C5.2 C6.2 C7.1 C8.1 C9.1 C10.1 C11.1 C12.1 C13.1 C14.1 C15.1 C16.1 C17.1 C18.1 C19.1 C20.1 C21.1 C22.1 C23.1 C24.1 C25.1 C26.1 C27.1 C28.2 C29.2 C30.1 C31.1 C32.2 C33.2 C34.2 C35.1 C36.1 C37.1 C38.1 C39.2 C40.1 C43.1 C44.1 C45.1 C46.2 C47.1 C48.1 JP1.1 Q1.2 R4.1 R6.1 R10.2 R13.2 SW2.2 U1.A1 U1.A17 U1.B2 U1.B6 U1.C10 U1.C13 U1.C16 U1.F2 U1.G7 U1.G8 U1.G9 U1.G10 U1.G11 U1.G16 U1.H7 U1.H8 U1.H9 U1.H10 U1.H11 U1.J3 U1.J7 U1.J8 U1.J9 U1.J10 U1.J11 U1.J16 U1.J17 U1.K7 U1.K8 U1.K9 U1.K10 U1.K11 U1.K15 U1.L7 U1.L8 U1.L9 U1.L10 U1.L11 U1.L15 U1.M15 U1.N1 U1.N16 U1.P1 U1.R4 U1.R8 U1.T12 U1.U1 U1.U17 U2.A3 U2.B3 U2.B8 U2.C1 U2.D1 U2.E9 U2.F1 U2.L3 U2.L9 U2.M1 U2.N1 U2.P3 U2.P8 U2.R3 U3.4 U3.9 U4.59 U4.60 U4.61 U4.62 U5.1 U5.2 U5.61 U5.62 U6.21 X1.2 X1.4 | length 9054.2
  Top Layer w8.86: v1(387.76,1160.21) U1.U1@403.51,1144.46 ; v1(388.67,623.6) 388.67,625.68 U1.U17@403.51,640.53 ; v1(419.26,782.26) U1.T12@435.01,798.01 ; v1(449.5,933.27) 451.89,933.27 461.17,923.99 U1.R8@466.5,923.99 ; v1(450.64,1065.56) 450.93,1065.56 U1.R4@466.5,1049.98 ; v1(484,1158.85) 484,1158.46 U1.P1@498,1144.46 ; v1(513.75,656.28) U1.N16@529.5,672.02 ; U1.M15@560.99,702.44 U1.M15@560.99,703.52 ; v1(576.74,813.76) U1.L11@592.49,829.5 ; v1(576.74,850.46) 578.43,852.15 583.64,852.15 U1.L10@592.49,861 ; v1(576.74,908.24) U1.L9@592.49,892.5 ; v1(576.74,939.74) U1.L8@592.49,923.99 ; v1(576.74,971.24) U1.L7@592.49,955.49 ; v1(608.24,971.24) U1.K7@623.98,955.49 ; U1.J16@655.48,669.72 669.85,655.35 v1(669.85,654.76) ; U1.J11@655.48,829.5 v1(671.23,813.76) ; U1.J7@655.48,955.49 670.84,970.85 v1(673.01,970.85) ; U1.J3@655.48,1081.47 672.35,1098.34 v1(672.35,1099.92) ; U1.H7@686.98,955.49 v1(702.72,971.24) ; U1.G16@718.47,672.02 722,672.02 v1(737.75,656.28) ; U1.G11@718.47,829.5 v1(734.22,813.76) ; U1.G10@718.47,861 v1(734.22,845.25) ; U1.G9@718.47,892.5 v1(734.22,908.24) ; U1.G8@718.47,923.99 v1(734.22,939.74) ; U1.G7@718.47,955.49 v1(734.22,971.24) ; U1.F2@749.97,1112.97 749.97,1119.14 765.72,1134.89 v1(765.72,1136.01) ; U1.C16@844.46,672.02 859.63,656.85 v1(859.77,656.85) ; U1.C13@844.46,766.51 844.46,764.65 856.67,752.44 v1(856.67,750.05) ; U1.C10@844.46,861 v1(860.2,845.25) ; U1.B6@875.95,986.98 880.14,986.98 889.31,996.15 v1(891.7,996.15) ; U1.A17@907.45,640.53 907.45,639.33 917.04,629.74 v1(917.04,627.35)
  Top Layer w12: SW2.2@155,1203.41 v1(155,1206) ; v1(300,1251) 344,1251 U3.9@373,1280 ; v1(372.53,149.08) U2.A3@372.53,128.01 U2.B3@404.02,128.01 ; v1(387.76,1160.21) 407.76,1180.21 462.64,1180.21 v1(484,1158.85) ; U3.9@397.46,1305 458.38,1365.93 458.38,1417.44 492.94,1452 Q1.2@502,1452 ; U2.B8@404.02,285.49 405.05,285.49 417.47,297.91 v1(418.5,297.91) ; U2.C1@435.52,65.02 436.64,65.02 440.66,61 461.88,61 465.89,65.02 U2.D1@467.02,65.02 467.02,37.89 443,13.87 443,-1.87 454.13,-13 469.87,-13 484.71,1.84 484.71,4.66 497.4,17.36 ; U2.C1@435.76,64.78 435.76,38.74 v1(436,38.5) ; v1(479.77,338.06) 480.53,337.3 480.53,335.87 498.51,317.89 U2.E9@498.51,316.98 ; U1.P1@498,1144.46 501.21,1144.46 505.46,1148.72 525.24,1148.72 U1.N1@529.5,1144.46 ; v1(499,2) 498.23,2.77 498.23,16.52 497.4,17.36 ; v1(510.32,1452.68) 521.18,1452.68 529.91,1461.41 529.91,1485.7 545.91,1501.7 545.91,1596.91 C37.1@548,1599 ; U1.N16@529.5,672.02 531.42,672.02 560.99,701.59 U1.M15@560.99,702.44 ; U2.F1@530.01,65.02 530.01,38.5 511.01,19.5 499.54,19.5 497.4,17.36 ; U3.4@551,1380 558.88,1380 587.79,1351.09 593.07,1351.09 X1.2@602,1342.16 ; C37.1@552,1603 v1(549,1600) C37.1@548,1599 ; U1.M15@560.99,703.52 591.91,703.52 U1.L15@592.49,702.94 ; v1(576.74,850.46) v1(576.74,908.24) ; U1.L15@592.49,703.52 U1.L15@592.49,702.94 ; U1.L11@592.49,829.5 U1.K11@623.98,829.5 U1.J11@655.48,829.5 U1.H11@686.98,829.5 U1.G11@718.47,829.5 ; U1.L10@592.49,861 U1.K10@623.98,861 U1.J10@655.48,861 U1.H10@686.98,861 U1.G10@718.47,861 ; U1.L9@592.49,892.5 U1.K9@623.98,892.5 U1.J9@655.48,892.5 U1.H9@686.98,892.5 U1.G9@718.47,892.5 ; U1.L8@592.49,923.99 U1.K8@623.98,923.99 U1.J8@655.48,923.99 U1.H8@686.98,923.99 U1.G8@718.47,923.99 ; U1.L7@592.49,955.49 U1.K7@623.98,955.49 U1.J7@655.48,955.49 U1.H7@686.98,955.49 U1.G7@718.47,955.49 ; v1(595.31,699.9) 595.31,700.11 U1.L15@595.2,700.23 ; C35.1@611.46,1599 C37.1@554.09,1599 C37.1@548,1599 ; X1.2@614.63,1333.46 663.94,1284.16 677.84,1284.16 X1.4@690,1272 ; X1.2@618.17,1337 632.25,1351.09 632.25,1365.25 BOOT.2@665,1398 ; v1(620,1598) 620,1609.51 642.49,1632 825,1632 827.72,1629.28 831.16,1629.28 833,1627.43 C48.1@833,1625.43 ; U1.J17@655.48,640.53 655.48,669.72 U1.J16@655.48,672.02 U1.K15@623.98,703.52 615.06,703.52 611.77,700.23 U1.L15@595.2,700.23 ; U2.L3@687.49,128.01 v1(687.49,149.5) 710.99,173 758.48,173 v1@781.98,149.5 ; U2.L9@687.49,316.98 687.62,317.11 687.62,338.98 v1(687.74,339.11) ; v1(687.9,6.41) 711.06,29.57 711.06,46.23 v1(711.83,47) ; X1.4@695.34,1266.54 v1(695.34,1269.66) ; v1@710,47 711.06,48.06 711.06,48.85 709.75,50.16 709.75,54.66 718.98,63.89 U2.M1@718.98,65.02 719.78,64.22 724.18,64.22 724.73,63.67 748.01,63.67 750.24,61.44 750.24,45.67 752.83,43.08 v1(752.83,42) ; C30.1@770,1283.28 824,1337.28 C44.1@824,1371 ; C43.1@773,1372.46 774.54,1374 C44.1@821,1374 ; U2.P8@781.98,285.49 781.98,286.61 796,300.63 v1(796,301) ; v1(782.86,149.5) v1@781.98,149.5 ; v1(813.47,149.5) U2.R3@813.47,128.01 ; C44.1@825,1371 v1(825,1372) ; v1(835,1625) C48.1@835,1625.43 ; v1(864,233) 870.87,226.13 870.87,217.81 873.02,215.66 873.02,135.04 865.99,128.01 U2.R3@813.47,128.01 ; v1(870,1301) C32.2@940,1301 C32.2@941,1301 ; U1.B2@875.95,1112.97 899.03,1136.05 899.03,1141.33 v1(923.2,1165.5) ; R13.2@999,1477 999,1511.27 R10.2@999.73,1512 ; v1(1106,1299) 3.3V.2@1106,1301 ; v1(1385,318) JP1.1@1386.07,316.93 ; U1.L15@592.49,702.94 U1.L15@595.2,700.23 ; v1@781.98,149.5 781.98,142.12 U2.P3@781.98,128.01 U2.R3@813.47,128.01
  Layer 3 w12: v1(418.5,297.91) 418.5,347.48 420.02,349 420.02,355.77 431.24,367 450.82,367 v1@479.75,338.06 ; v1(450.64,1065.56) 450.64,1065.8 436,1080.45 436,1133.18 443.03,1140.21 456.03,1140.21 473.82,1158 483.15,1158 v1(484,1158.85) ; v1(576.74,813.76) 602.65,787.85 602.65,777.91 579.68,754.94 578.94,754.94 560.3,736.3 560.3,714.7 574.33,700.67 594.55,700.67 v1(595.31,699.9) ; v1(672.35,1099.92) 672.63,1099.92 683.99,1111.28 702.41,1111.28 727.14,1136.01 v1(765.72,1136.01) ; v1(722,376.22) 750.22,376.22 754,380 756,378 800.4,378 850.78,327.62 850.78,294.78 834,278 819,278 v1(796,301) ; v1(737.75,656.28) 737.75,657.82 741.35,661.42 741.35,666.51 752.1,677.26 767.65,677.26 769.33,675.57 838.58,675.57 ; v1@766.28,1135.45 815.82,1185 841,1185 841.5,1185.5 903.2,1185.5 v1(923.2,1165.5) ; v1(856.67,750.05) 856.67,748.51 838.58,730.42 838.58,675.57 ; v1@858.7,655.45 889.38,624.78 890.86,626.26 915.95,626.26 v1(917.04,627.35) ; v1@859.3,750.85 859.3,751.14 874.14,765.98 874.34,765.98 874.34,830.04 860.2,844.17 v1(860.2,845.25) 906.91,891.96 906.91,900.34 907,900.43 907,979.31 891.7,994.61 v1(891.7,996.15) ; v1(859.77,656.85) 859.24,656.85 840.52,675.57 838.58,675.57
  Layer 4 w12: v1(329.5,250.18) 367.96,288.64 367.96,306.05 378.77,316.86 399.55,316.86 v1(418.5,297.91) ; v1(372.53,149.08) 404.92,149.08 433.47,120.53 433.47,88.3 433.11,87.94 433.11,66.47 435.23,64.35 435.23,39.27 v1(436,38.5) ; v1(687.74,339.11) 688.51,339.88 688.51,342.73 v1(722,376.22)
  Bottom Layer w12: U5.1@-95.47,464.56 -96,464.02 v1(-96,440) -95.5,439.5 -95.5,413.5 -94.5,412.5 -94.5,382.5 v1(-94,382) ; v1(94,378) 95.47,379.47 U5.2@95.47,464.56 ; C18.1@279.72,1223 300,1243.28 v1(300,1251) ; v1(329.5,250.18) 329.5,249.1 320.08,239.68 320.08,231.89 319.13,230.94 319.13,205.13 287,173 287,134.11 295.93,125.17 302.83,125.17 307,121 327,121 341.92,135.92 341.92,146.11 342.81,147 369.36,147 371.45,149.08 v1(372.53,149.08) ; C3.1@361.28,823 365.13,819.16 365.13,811.03 372.5,803.66 398.34,803.66 417,785 C4.2@417,784 ; C39.2@431,1558 419.38,1569.62 419.38,1592.16 R4.1@415.54,1596 427.86,1608.33 427.86,1608.69 436.17,1617 493,1617 ; v1(499,2) 496.1,2 494.18,3.92 494.18,5.67 487.15,12.7 483.62,12.7 476,20.32 476,52.97 483.03,60 702.09,60 711.06,51.02 711.06,47.77 v1(711.83,47) ; C29.2@509.43,1554 482,1581.43 482,1606 493,1617 ; v1(510.32,1452.68) 511.41,1453.77 511.41,1471.41 C28.2@512,1472 ; C38.1@543.72,1603 526.87,1619.84 495.84,1619.84 493,1617 ; C38.1@546.72,1600 v1(549,1600) ; C26.1@565.81,971 565.93,971.12 576.62,971.12 v1(576.74,971.24) v1(576.74,939.74) v1(576.74,908.24) C27.1@576.62,908.12 ; C25.1@576.61,845.13 C25.1@576.74,845.25 ; v1(576.74,813.76) C25.1@576.74,845.25 ; v1(576.74,850.46) C25.1@576.74,845.25 ; C23.1@577.51,805.7 578.4,804.81 C23.1@579,804.81 ; C19.1@607,983.19 607.62,982.57 607.62,971.86 v1(608.24,971.24) ; v1(669.85,654.76) 670.57,654.76 685.32,640 718.14,640 725.23,647.09 727.03,647.09 736.21,656.28 v1(737.75,656.28) ; v1(687.49,149.5) 710.12,126.87 726.13,126.87 748,105 748,73.13 750.48,70.65 750.48,42.39 750.87,42 v1(752.83,42) ; v1(687.74,339.11) C10.1@687.74,353.93 ; v1(687.9,6.41) 687.9,5.48 C15.1@688,5.38 ; v1(695.34,1269.66) 756.66,1269.66 v1(770,1283) ; v1(702.72,971.24) C20.1@702.86,971.37 ; C12.1@720,379 722,377 v1(722,376.22) ; 721,642 722.66,640.34 747.06,640.34 748.2,639.2 750.52,639.2 766.13,623.59 771.31,623.59 C7.1@768.72,621 ; v1(734.22,813.76) 734.99,812.99 734.99,804.83 736.13,803.69 736.13,802.7 737.02,801.81 738,801.81 ; v1(734.22,908.24) 734.34,908.12 744.07,908.12 744.19,908 ; v1(734.22,939.74) 735.3,939.74 736.69,941.13 742.3,941.13 743.19,942.02 743.19,943 ; v1(734.22,971.24) 734.99,972 734.99,979.18 736.12,980.31 736.12,981.3 737.01,982.19 C22.1@738,982.19 ; C7.1@766.87,619 768.72,617.16 768.72,584.28 780,573 801,573 C2.1@815,587 ; v1(775,1481) 852.07,1481 v1@869,1497.93 ; C34.2@787,1551.72 812.28,1551.72 ; v1(796,301) 821.56,275.44 841.56,275.44 863.23,253.77 863.23,233.77 v1(864,233) ; v1(813.47,149.5) 813.72,149.25 826.94,149.25 C8.1@827.19,149 ; C47.1@833.64,1626.36 811.28,1604 811.28,1552.72 812.28,1551.72 ; v1(835,1625) C47.1@836,1624 ; C47.1@836.36,1624.36 846.72,1614 C46.2@904.46,1614 ; v1@865,1499 812.28,1551.72 ; v1(870,1497.38) 906.05,1461.34 906.05,1444.39 946.43,1404 994,1404 1013,1423 1013,1463 v1(1004,1472) ; C40.1@875.46,1377 872.6,1374.14 828.14,1374.14 825.14,1371.14 846.02,1350.27 951.45,1350.27 959.68,1358.5 966.5,1358.5 986,1378 986,1403 ; C6.2@890,996 C6.2@890,996.15 ; v1(891.7,996.15) C6.2@890,996.15 ; C1.1@963,965 963,992 940.66,1014.34 906.63,1014.34 890,997.72 C6.2@890,996.15 ; U4.59@1214.54,1035.42 1214.54,1119.54 v1(1215,1120) ; v1(1310,376) U4.61@1310,377.95 ; U4.62@1310,1122.05 1311.05,1121 v1(1403,1121) 1403,1036.5 1404.08,1035.42 U4.60@1405.47,1035.42
  other v1: 2,376 95,412 -95,413 95,439 1215,1067 1403.99,1074 1214,1096 1402.99,1099 -3,1123 608.39,1334.39